# Altium PCB PCB1.PcbDoc
Units mm, origin at the board's own origin, x right, y up, seen from the top; angles counter-clockwise.
Board outline 152.4 x 101.6 mm, 2 copper layers (Top Layer, Bottom Layer); 57 components, 35 nets, 177 pads, 145 vias.
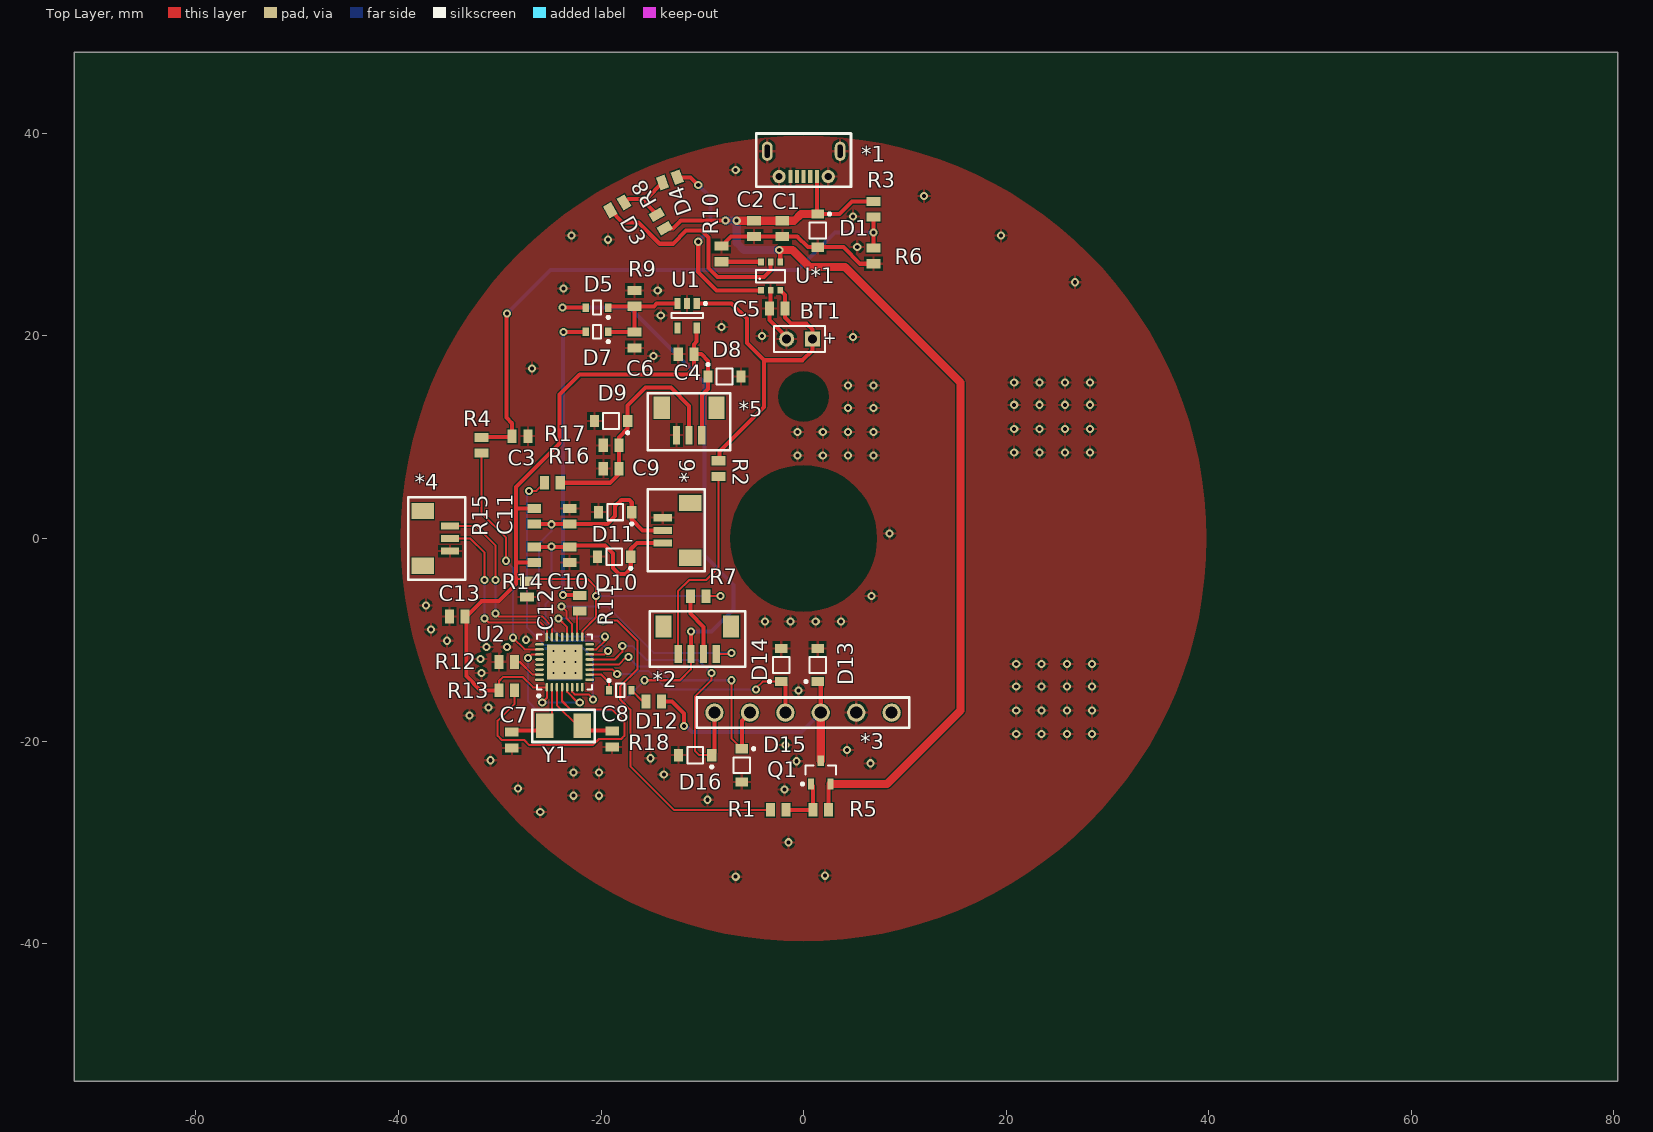
[diagram p0: Top Layer view]
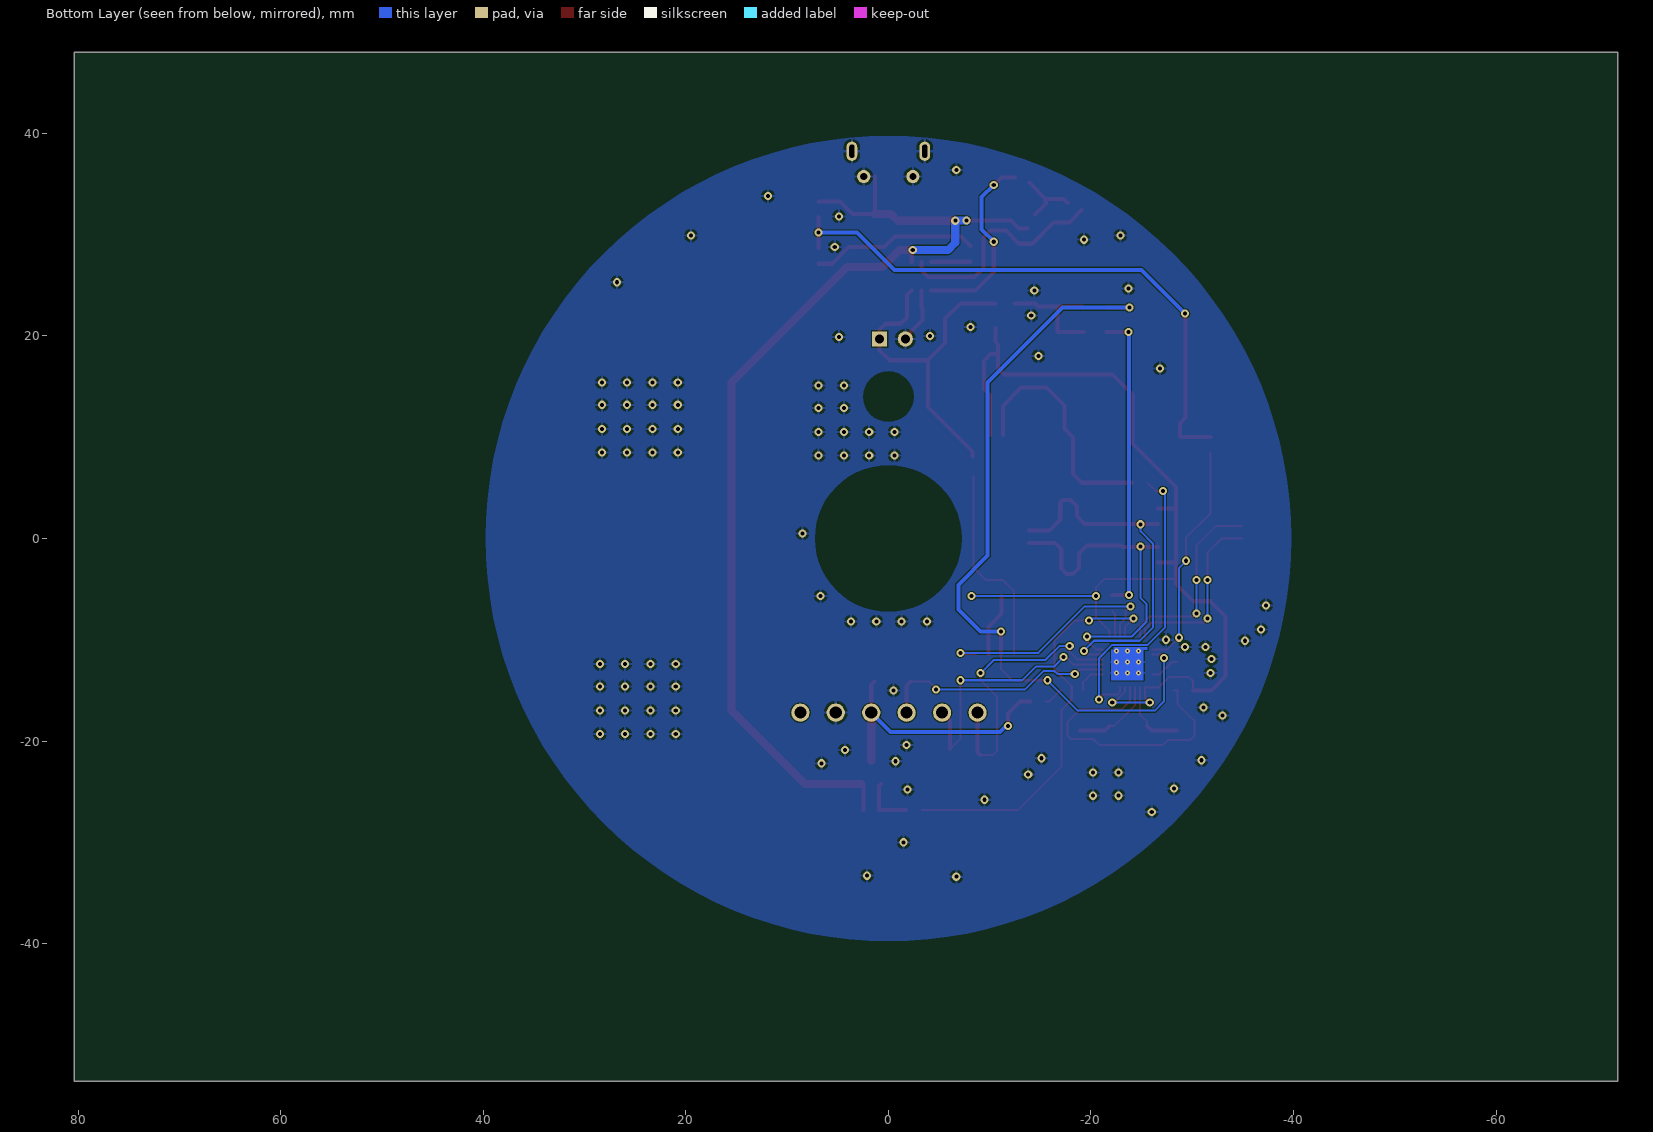
[diagram p1: Bottom Layer view, seen from below]

## Layer stack, top to bottom
Top Solder: solder mask 0.0102, Solder Resist, Dk 3.5
Top Layer: signal copper 0.0356
Dielectric 1: dielectric 0.32, FR-4, Dk 4.8
Bottom Layer: signal copper 0.0356
Bottom Solder: solder mask 0.0102, Solder Resist, Dk 3.5

## Board outline
-72.009,-53.594 80.391,-53.594 80.391,48.006 -72.009,48.006

## Design rules (kind name [scope] priority, off if disabled: settings)
Clearance [All] p1: gap=0.1
PolygonConnect [All] p1: connectstyle=Relief reliefconductorwidth=0.254 reliefentries=4 polygonreliefangle="90 Angle" airgapwidth=0.254
RoutingVias [All] p1: holewidth=0.711 width=1.27 viastyle="Through Hole" minholewidth=0.711 minwidth=1.27 maxholewidth=0.711 maxwidth=1.27
SolderMaskExpansion [All] p1: expansion=0.102
Width Width_1 [All] p1: maxlimit=0.8 minlimit=0.2 preferedwidth=0.2
Width [InNet('VBUS')] p2: maxlimit=2 minlimit=0.2 preferedwidth=0.2
29 further rules are at their usual default settings.

## Components (designator, comment, footprint, x,y, rotation, side; value= is the part's Value field where it differs from the comment)
*1 "MicroUSB" MicroUSB 0,35.8 r0 top
*2 "Plugin4P" PLUGIN4P -10.5,-11.4 r180 top
*3 "POGO" POGO 1.7,-17.2 r180 top
*4 "Plugin3P" Plugin3P -34.9,0 r270 top
*5 "Plugin3P" Plugin3P -11.3,10.2 r180 top
*6 "Plugin3P" Plugin3P -13.9,0.8 r90 top
BT1 "Battery" BAT-2 -0.4,19.7 r180 top
C1 "22uf" RESC2013X65X40LL15T20 -2.1,30.6 r90 top
C2 "22uf" RESC2013X65X40LL15T20 -4.9,30.6 r90 top
C3 "10uf" RESC2013X65X40LL15T20 -28,10.1 r180 top
C4 "10uf" RESC2013X65X40LL15T20 -11.6,18.2 r0 top
C5 "10uf" RESC2013X65X40LL15T20 -2.6,22.7 r0 top
C6 "2.2uf" RESC2013X65X40LL15T20 -16.7,19.6 r90 top
C7 "20pf" RESC2013X65X40LL15T20 -28.8,-19.9 r90 top
C8 "20pf" RESC2013X65X40LL15T20 -18.9,-19.8 r90 top
C9 "0.1uf" RESC2013X65X40LL15T20 -19,6.9 r180 top
C10 "0.1uf" RESC2013X65X40LL15T20 -23.1,-1.6 r270 top
C11 "0.1uf" RESC2013X65X40LL15T20 -23.1,2.2 r90 top
C12 "22uf" RESC2013X65X40LL15T20 -27.3,-5 r90 top
C13 "22uf" RESC2013X65X40LL15T20 -34.2,-7.7 r0 top
D1 "PTVSHC1DF7VB" ONSC-SOD-123-2-425-04_V 1.4,30.4 r270 top
D3 "LED4" RESC2013X65X40LL15T20 -18.4,32.8 r30 top
D4 "LED3" RESC2013X65X40LL15T20 -13.2,35.4 r200 top
D5 "1N5819WS" ONSC-SOD-323-2-477-02_V -20.4,22.8 r180 top
D7 "1N5819WS" ONSC-SOD-323-2-477-02_V -20.4,20.4 r180 top
D8 "PTVSHC1DF7VB" ONSC-SOD-123-2-425-04_V -7.8,16 r0 top
D9 "PTVSHC1DF7VB" ONSC-SOD-123-2-425-04_V -19,11.6 r180 top
D10 "PTVSHC1DF7VB" ONSC-SOD-123-2-425-04_V -18.7,-1.8 r180 top
D11 "PTVSHC1DF7VB" ONSC-SOD-123-2-425-04_V -18.6,2.6 r180 top
D12 "1N4007" ONSC-SOD-323-2-477-02_V -18.1,-15 r0 top
D13 "PTVSHC1DF7VB" ONSC-SOD-123-2-425-04_V 1.4,-12.5 r90 top
D14 "PTVSHC1DF7VB" ONSC-SOD-123-2-425-04_V -2.2,-12.5 r90 top
D15 "PTVSHC1DF7VB" ONSC-SOD-123-2-425-04_V -6.1,-22.4 r270 top
D16 "PTVSHC1DF7VB" ONSC-SOD-123-2-425-04_V -10.7,-21.4 r180 top
Q1 "AO3401" INF-PG-SOT23_N 1.7,-23.1 r90 top
R1 "330" RESC2013X65X40LL15T20 -2.5,-26.8 r180 top
R2 "4.7k" RESC2013X65X40LL15T20 -8.4,6.9 r90 top
R3 "4.7k" RESC2013X65X40LL15T20 6.9,32.5 r270 top
R4 "100" RESC2013X65X40LL15T20 -31.8,9.2 r270 top
R5 "10k" RESC2013X65X40LL15T20 1.7,-26.8 r180 top
R6 "10k" RESC2013X65X40LL15T20 6.9,27.9 r90 top
R7 "680" RESC2013X65X40LL15T20 -10.4,-5.7 r0 top
R8 "1k" RESC2013X65X40LL15T20 -14.1,31.3 r300 top
R9 "100k" RESC2013X65X40LL15T20 -16.7,23.7 r90 top
R10 "5k" RESC2013X65X40LL15T20 -8.1,28.1 r270 top
R11 "4.7k" RESC2013X65X40LL15T20 -22.1,-6.4 r270 top
R12 "10k" RESC2013X65X40LL15T20 -29.3,-12.2 r180 top
R13 "10k" RESC2013X65X40LL15T20 -29.3,-15 r180 top
R14 "4.7k" RESC2013X65X40LL15T20 -26.6,-1.6 r270 top
R15 "4.7k" RESC2013X65X40LL15T20 -26.6,2.2 r90 top
R16 "4.7k" RESC2013X65X40LL15T20 -24.8,5.5 r180 top
R17 "100k" RESC2013X65X40LL15T20 -19,9.2 r0 top
R18 "470" RESC2013X65X40LL15T20 -14.8,-16.1 r0 top
U1 "TLV70233DBVR" TI-DBV5_N -11.5,22 r270 top
U2 "STM32F051K6U6" STM-UFQFPN32_N -23.6,-12.2 r90 top
U*1 "TP4057" TP4057 -4.2,24.5 r90 top
Y1 "8mhz" XTAL -23.7,-18.5 r180 top

## Footprints (in the part's own frame and the unit in brackets; to place one, negate y for a bottom-side part, rotate by r counter-clockwise, add the part's x,y. Pads: shape width x height; smd on the part's side, far side on the other; paste and mask are expansions set on the pad)
BAT-2 [mm] "Multicell Battery; 2 Leads"
  rect 1.5x1.5 hole 0.9: 1(-1.27,0)
  round 1.5 hole 0.9: 2(1.27,0)
  silkscreen extent -2.54,-1.27 2.54,1.27
INF-PG-SOT23_N [mm] "SOT23, 3-Leads, Body 2.9x1.3mm, Pitch 0.95mm, IPC Medium Density"
  rect 1.05x0.6 smd: 1(-1.15,0.95) 2(-1.15,-0.95) 3(1.15,0)
  silkscreen extent -1.27,-1.5 0.7,1.92, body extent -0.7,-1.5 0.7,1.5, height 1.1
MicroUSB [mm]
  rect 0.4x1.25 smd: 1(1.313,-0.062) 2(0.663,-0.062) 3(0.013,-0.062) 4(-0.637,-0.062) 5(-1.287,-0.062)
  oval 1.07x1.9 hole 0.5 slot 1.3 at 90 deg: 5(-3.587,2.438) 5(3.613,2.438)
  round 1.3 hole 0.7: 5(-2.412,-0.062) 5(2.438,-0.062)
  silkscreen extent -4.69,-1.06 4.69,4.19
ONSC-SOD-123-2-425-04_V [mm] "SOD, 2-Leads, Body 2.69x1.6mm"
  rect 0.91x1.22 smd: 1(-1.635,0) 2(1.635,0)
  silkscreen extent -1.76,-0.8 0.78,1.29, body extent -1.35,-0.8 1.35,0.8, height 1.35
ONSC-SOD-323-2-477-02_V [mm] "SOD, 2-Leads, Body 1.7x1.25mm"
  rect 0.63x0.83 smd: 1(-1.115,0) 2(1.115,0)
  silkscreen extent -1.24,-0.67 0.4,1.09, body extent -0.85,-0.63 0.85,0.63, height 1.06
Plugin3P [mm]
  rect 0.7x1.8 smd: 1(-1.25,0) 2(0,0) 3(1.25,0)
  rect 1.6x2.2 smd: ""(-2.7,-2.7) ""(2.7,-2.7)
  silkscreen extent -4.05,-4.13 4.08,1.48
PLUGIN4P [mm]
  rect 0.7x1.8 smd: 1(-1.875,0) 2(-0.625,0) 3(0.625,0) 4(1.875,0)
  rect 1.6x2.2 smd: ""(-3.325,-2.7) ""(3.325,-2.7)
  silkscreen extent -4.73,-4.2 4.67,1.28
POGO [mm]
  round 1.8 hole 1.2: 1(-7,0) 2(-3.5,0) 3(0,0) 4(3.5,0) 5(7,0) 6(10.5,0)
  silkscreen extent -8.75,-1.5 12.25,1.5
RESC2013X65X40LL15T20 [mm] "Chip Resistor, 2-Leads, Body 2.00x1.3 mm, IPC High Density"
  rect 0.9x1.35 smd: 1(-0.775,0) 2(0.775,0)
  body extent -1.07,-0.72 1.07,0.72, height 0.65
STM-UFQFPN32_N [mm] "QFN, 32-Leads, Body 5.1x5.1mm, Pitch 0.5mm, Thermal Pad 3.5x3.5mm, IPC Medium Density"
  oval 0.85x0.25 smd: 1(-2.475,1.75) 2(-2.475,1.25) 3(-2.475,0.75) 4(-2.475,0.25) 5(-2.475,-0.25) 6(-2.475,-0.75) 7(-2.475,-1.25) 8(-2.475,-1.75) 17(2.475,-1.75) 18(2.475,-1.25) 19(2.475,-0.75) 20(2.475,-0.25) 21(2.475,0.25) 22(2.475,0.75) 23(2.475,1.25) 24(2.475,1.75)
  oval 0.25x0.85 smd: 9(-1.75,-2.475) 10(-1.25,-2.475) 11(-0.75,-2.475) 12(-0.25,-2.475) 13(0.25,-2.475) 14(0.75,-2.475) 15(1.25,-2.475) 16(1.75,-2.475) 25(1.75,2.475) 26(1.25,2.475) 27(0.75,2.475) 28(0.25,2.475) 29(-0.25,2.475) 30(-0.75,2.475) 31(-1.25,2.475) 32(-1.75,2.475)
  rect 3.5x3.5 smd: 33(0,0)
  silkscreen extent -3.47,-2.7 2.7,2.7, body extent -2.55,-2.55 2.55,2.55, height 0.6
TI-DBV5_N [mm] "SOT23, 5-Leads, Body 2.9x1.6mm, Pitch 0.95mm, IPC Medium Density"
  rect 1.1x0.6 smd: 1(-1.2,0.95) 2(-1.2,0) 3(-1.2,-0.95) 4(1.2,-0.95) 5(1.2,0.95)
  silkscreen extent -1.32,-1.55 0.25,1.93, body extent -0.87,-1.52 0.87,1.53, height 1.45
TP4057 [mm]
  rect 0.65x0.55 smd: 1(0,0) 2(0,-0.95) 3(0,-1.9) 4(2.8,-1.9) 5(2.8,-0.95) 6(2.8,0)
  silkscreen extent 0.76,-2.38 2.03,0.51
XTAL [mm]
  rect 1.7x2.4 smd: 1(-1.85,0) 2(1.85,0)
  silkscreen extent -3.1,-1.58 3.1,1.6

## Part data
BT1: "Multicell Battery"
C1 C2 C3 C4 C5 C6 C7 C8 C9 C10 C11 C12 C13: library part Cap, "Capacitor"
D1 D8 D9 D10 D11 D13 D14 D15 D16: library part MMSZ39T1G, "Zener Voltage Regulator, 500 mW, 2-Pin SOD-123, Pb-Free, Tape and Reel"
D3: library part LED3, "Typical BLUE SiC LED"
D4: "Typical BLUE SiC LED"
D5 D7 D12: library part "Diode 1N5402", "3 Amp General Purpose Rectifier"
Q1: library part "BSS215P H6327", "P-Channel OptiMOS P2 Small-Signal-Transistor, -20?V VDS, -1.5?A ID, -55 to 150 degC, PG-SOT23, Reel, Green"
R1 R2 R3 R4 R5 R6 R7 R8 R9 R10 R11 R12 R13 R14 R15 R16 R17 R18: library part CRG0805ZR, "Chip Resistor, 0 Ohm, 0.125 W, -55 to 125 degC, 0805 (2012 Metric), RoHS, Tape and Reel"
U1: "Single Output LDO, 300 mA, Fixed 3.3 V Output, 2 to 5.5 V Input, with Low IQ, 5-pin SOT-23 (DBV), -40 to 125 degC, Green (RoHS & no Sb/Br)"
U2: "ARM Cortex-M0 32-bit MCU, 32 KB Flash, 4 KB Internal RAM, 27 I/Os, 32-pin UFQFPN, -40 to 85 degC, Tray"
Y1: library part XTAL, "Crystal Oscillator"

## Via types
v1: diameter 0.8, hole 0.4, Top Layer to Bottom Layer, 136 vias
v2: diameter 0.5, hole 0.2, Top Layer to Bottom Layer, 9 vias

## Nets (pads, with @x,y where several pads share a name; then routed paths per layer and width w, separated by ;. In a path a pad name is that pad's centre, name@x,y a point inside that pad or via, vN(x,y) a via of type N, cw(c..) or ccw(c..) an arc to the next point about the centre after c; other vN are vias at no path point)
+3.3: *5.1 C4.2 C12.2 C13.2 D8.1 R7.2 R13.2 R14.2 R15.2 U1.5 U2.1 U2.5 U2.17 | length 108.8
  Top Layer w0.2: R13.2 -30.075,-14.075 -29.7,-13.7 -27.7,-13.7 -26.7,-14.7 -25.4,-14.7 -25.35,-14.65 U2.1 -25.35,-15.75 v1@-25.6,-16 ; -28.4,-4 -21.3,-4 -20.5,-4.8 -20.5,-7.8 -21.85,-9.15 U2.17 ; U2.5 -23.35,-15.15 -22.35,-16.15 v1@-22.1,-15.9 ; R7.2 v1(-8.2,-5.7)
  Top Layer w0.4: R13.2 -31.9,-15 -33.3,-13.6 -33.3,-7.7 -31.8,-6.2 -30.1,-6.2 -28.4,-4.5 -28.4,-4 -28.4,5.1 -24.1,9.4 -24.1,14.2 -22.1,16.2 -11.4,16.2 -10.825,16.775 C4.2 ; -28.375,-2.375 R14.2 ; -28.375,2.975 R15.2 ; U1.5 -10.55,19.45 -10.825,19.175 C4.2 ; *5.1 -10.05,14.15 -9.435,14.765 D8.1 -9.435,17.535 -10.1,18.2 C4.2
  Bottom Layer w0.2: v1(-25.8,-16.2) v1(-22.1,-16.2) ; v1(-20.5,-5.7) v1(-8.2,-5.7)
ADC: R16.2 U2.6 | length 29.9
  Top Layer w0.2: v1(-27.1,4.7) -26.375,4.7 R16.2 ; U2.6 -22.85,-15.15 -22.6,-15.4 -21.2,-15.4 v1@-20.9,-15.7
  Bottom Layer w0.2: v1(-27.1,4.7) -27.3,4.5 -27.3,-8.8 -25.6,-10.5 -22.1,-10.5 -20.8,-11.8 v1(-20.8,-15.9)
BAT: BT1.1 C5.2 R2.2 U1.1 U*1.3 | length 35
  Top Layer w0.4: U1.1 -7.1,23.2 -5.6,21.7 -5.6,19.3 -3.9,17.6 ; R2.2@-8.3,8.1 -8.3,8.6 -3.9,13 -3.9,17.6 ; U*1.3 -1.825,24.025 C5.2 -1.825,21.825 -1.2,21.2 0.3,21.2 0.87,20.63 BT1.1 0.87,18.57 -0.1,17.6 -3.9,17.6
GND: *1.5 *3.2 *4.3 *5.3 *6.3 BT1.2 C1.1 C2.1 C3.1 C4.1 C5.1 C6.1 C7.1 C8.1 C9.2 C10.2 C11.2 C12.1 C13.1 D1.2 D8.2 D9.2 D10.2 D11.2 D13.2 D14.2 D15.2 D16.2 R6.1 R9.2 R10.1 R12.2 R17.1 U1.2 U2.33 U*1.2 | length 28.7
  Top Layer w0.4: R10.1 -7.175,29.8 -4.925,29.8 C2.1 C1.1 -0.625,29.825 0.435,28.765 D1.2 3.935,28.765 5.575,27.125 R6.1 ; U*1.2 -3.25,22.825 C5.1 -3.375,21.575 -1.67,19.87 BT1.2
  Bottom Layer w0.4: v2(-24.7,-12.2) v2(-23.6,-12.2) ; v2(-24.7,-11.1) v2(-23.6,-11.1) ; v2(-23.6,-13.3) v2(-23.6,-12.2) ; v2(-22.5,-12.2) v2(-23.6,-12.2) ; v2(-22.5,-11.1) v2(-23.6,-11.1) ; v2(-23.6,-12.2) v2(-23.6,-11.1)
  other v1: -6.7,-33.4 2.1,-33.3 -1.5,-30 -26,-27 -9.5,-25.8 -22.7,-25.4 -20.2,-25.4 -1.9,-24.8 -28.2,-24.7 -13.8,-23.3 -22.7,-23.1 -20.2,-23.1 6.6,-22.2 -0.7,-22 -30.9,-21.9 -15.1,-21.7 4.3,-20.9 -1.8,-20.4 21,-19.3 23.5,-19.3 26,-19.3 28.5,-19.3 -33,-17.5 21,-17 23.5,-17 26,-17 28.5,-17 -31.1,-16.7 -0.5,-15 21,-14.6 23.5,-14.6 26,-14.6 28.5,-14.6 -31.8,-13.3 21,-12.4 23.5,-12.4 26,-12.4 28.5,-12.4 -31.9,-11.9 -31.3,-10.7 -29.3,-10.7 -35.2,-10.1 -35.2,-10.1 -27.4,-10 -36.8,-9 -3.8,-8.2 -1.3,-8.2 1.2,-8.2 3.7,-8.2 -37.3,-6.6 6.7,-5.7 8.5,0.5 -0.6,8.2 1.9,8.2 4.4,8.2 6.9,8.2 20.8,8.5 23.3,8.5 25.8,8.5 28.3,8.5 -0.6,10.5 1.9,10.5 4.4,10.5 6.9,10.5 20.8,10.8 23.3,10.8 25.8,10.8 28.3,10.8 4.4,12.9 6.9,12.9 20.8,13.2 23.3,13.2 25.8,13.2 28.3,13.2 4.4,15.1 6.9,15.1 20.8,15.4 23.3,15.4 25.8,15.4 28.3,15.4 -26.8,16.8 -14.8,18 4.9,19.9 -4.1,20 -8.1,20.9 -14.1,22 -14.4,24.5 -23.7,24.7 26.8,25.3 5.3,28.8 -19.3,29.5 -22.9,29.9 19.5,29.9 4.9,31.8 11.9,33.8 -6.7,36.4
  other v2: -24.7,-13.3 -22.5,-13.3
KEY: *2.3 D5.2 U2.27 | length 75.5
  Top Layer w0.2: v1(-27.2,-11.8) -26.85,-11.45 U2.27 ; v1(-15.7,-14) -12.2,-14 -11.125,-12.925 *2.3
  Top Layer w0.4: v1(-23.8,22.8) D5.2 ; *2.3 v1@-11.125,-9.225
  Bottom Layer w0.2: v1(-27.2,-11.8) -27.2,-16.1 -26.3,-17 -18.7,-17 v1(-15.7,-14)
  Bottom Layer w0.4: v1(-23.8,22.8) -17.2,22.8 -9.8,15.4 -9.8,-1.7 -6.9,-4.6 -6.9,-7 -9.1,-9.2 v1(-11.1,-9.2)
MCU_CONTROL: D7.2 R11.1 | length 29.8
  Top Layer w0.4: v1(-23.74,-5.565) -22.16,-5.565 R11.1 ; v1(-23.705,20.395) D7.2@-21.52,20.395
  Bottom Layer w0.4: v1(-23.74,-5.565) v1@-23.74,20.36
MCU_ENCODE_A: *6.2 C11.1 D11.1 R15.1 U2.14 | length 36.9
  Top Layer w0.2: U2.14 -19.65,-11.45 v1(-19.3,-11.1)
  Top Layer w0.4: R15.1 C11.1 -19.375,1.425 -18.6,2.2 -18.6,3.2 -18,3.8 -17.2,3.8 -16.965,3.565 D11.1 -16.965,1.865 -15.9,0.8 *6.2
  Bottom Layer w0.2: v1(-24.9,1.4) -24.9,0.7 -26.1,-0.5 -26.1,-8.8 -24.8,-10.1 -20.3,-10.1 v1(-19.3,-11.1)
MCU_ENCODE_B: *6.1 C10.1 D10.1 R14.1 U2.15 | length 33.6
  Top Layer w0.2: U2.15 -20.45,-10.95 -19.6,-10.1 v1(-19.6,-9.7)
  Top Layer w0.4: R14.1 C10.1 -22.975,-0.7 -19.6,-0.7 -18.8,-1.5 -18.8,-2.9 -18.2,-3.5 -17.6,-3.5 -17.065,-2.965 D10.1 -17.065,-1.065 -16.45,-0.45 *6.1
  Bottom Layer w0.2: v1(-24.9,-0.8) -24.9,-5.9 -25.5,-6.5 -25.5,-8.2 -24,-9.7 v1(-19.6,-9.7)
MCU_POW_LED: *2.1 U2.19 | length 23.7
  Top Layer w0.2: v1(-23.9,-6.7) -23.4,-7.2 -23.4,-7.9 -22.85,-8.45 U2.19 ; *2.1 -7.2,-11.4 v1(-7.1,-11.3)
  Bottom Layer w0.2: v1(-23.9,-6.7) -19.4,-6.7 -14.8,-11.3 v1(-7.1,-11.3)
Net*2_2: *2.2 R7.1 | length 6.2
  Top Layer w0.4: R7.1 -11.175,-7.425 -9.875,-8.725 *2.2
Net*2_4: *2.4 R2.1 | length 20.2
  Top Layer w0.2: *2.4 -12.375,-5.175 -11.3,-4.1 -9.6,-4.1 -8.4,-2.9 R2.1
Net*3_4: *3.4 D14.1 U2.11 | length 23.6
  Top Layer w0.2: U2.11 -18.85,-12.95 v1(-18.4,-13.4) ; v1(-4.7,-14.9) -4.7,-14.8 -4.035,-14.135 D14.1
  Top Layer w0.4: D14.1 -1.8,-14.535 *3.4
  Bottom Layer w0.2: v1(-18.4,-13.4) -16.7,-13.4 -16.4,-13.1 -15.3,-13.1 -13.5,-14.9 v1(-4.7,-14.9)
Net*3_5: *3.5 D15.1 U2.12 | length 26.4
  Top Layer w0.2: U2.12 -18.25,-12.45 -17.5,-11.7 v1(-17.3,-11.7) ; v1(-7.1,-14) -7.1,-19.765 D15.1
  Top Layer w0.4: D15.1 -6.1,-18 *3.5
  Bottom Layer w0.2: v1(-17.3,-11.7) -16.35,-12.65 -14.55,-12.65 -13.2,-14 v1(-7.1,-14)
Net*3_6: *3.6 D16.1 U2.13 | length 28.5
  Top Layer w0.2: U2.13 -18.65,-11.95 -17.9,-11.2 v1(-17.9,-10.6) ; v1(-9.1,-13.3) -9.1,-14 -10.7,-15.6 -10.7,-21 -10.3,-21.4 D16.1
  Top Layer w0.4: D16.1 -8.8,-21.135 *3.6
  Bottom Layer w0.2: v1(-17.9,-10.6) -16.9,-10.6 -15.5,-12 -10.4,-12 v1(-9.1,-13.3)
Net*4_1: *4.1 U2.23 | length 19.2
  Top Layer w0.2: *4.1 -32.35,1.25 -30.4,-0.7 v1(-30.4,-4.1) ; v1(-30.4,-7.4) -30.1,-7.7 -25.8,-7.7 -24.85,-8.65 U2.23
  Bottom Layer w0.2: v1(-30.4,-7.4) v1(-30.4,-4.1)
Net*4_2: *4.2 U2.24 | length 17.8
  Top Layer w0.2: *4.2 -32.9,0 -31.5,-1.4 v1(-31.5,-4.1) ; v1(-31.5,-7.9) -31.1,-8.3 -26,-8.3 -25.35,-8.95 U2.24
  Bottom Layer w0.2: v1(-31.5,-7.9) v1(-31.5,-4.1)
Net*5_2: *5.2 C9.1 D9.1 R16.1 R17.2 | length 23.7
  Top Layer w0.4: R16.1 -19.1,5.5 -18.225,6.375 -18.225,7 R17.2 -18.225,9.975 -17.365,10.835 D9.1 -17.365,13.135 -15.6,14.9 -13.1,14.9 -11.3,13.1 *5.2
NetC3_2: C3.2 R3.2 R4.1 R6.2 | length 58
  Top Layer w0.4: R4.1@-31.825,10 -28.875,10 C3.2 -28.775,11.375 -29.335,11.935 -29.335,13 v1@-29.335,22.165 ; R6.2 R3.2
  Bottom Layer w0.4: v1(-29.3,22.2) -25,26.5 -0.6,26.5 3.1,30.2 v1(6.9,30.2)
NetC6_2: C6.2 D5.1 D7.1 R9.1 U1.3 | length 12.1
  Top Layer w0.4: D7.1@-19.285,20.4 -19.26,20.375 C6.2 R9.1 ; D5.1 -19.16,22.925 R9.1 ; U1.3 -14.5,23.2 -14.775,22.925 R9.1
NetC7_2: C7.2 U2.2 Y1.2 | length 7.3
  Top Layer w0.2: Y1.2 -25.55,-18.1 -24.85,-17.4 U2.2
  Top Layer w0.4: C7.2@-28.5,-18.975 -26.025,-18.975 Y1.2
NetC8_2: C8.2 U2.3 Y1.1 | length 8.3
  Top Layer w0.2: U2.3 -24.35,-16.45 -22.3,-18.5 Y1.1
  Top Layer w0.4: Y1.1 -21.375,-18.975 C8.2@-18.9,-18.975
NetD3_1: D3.1 U*1.5 | length 22.5
  Top Layer w0.4: D3.1 -17.859,31.2 -16.3,31.2 -14.2,29.1 -12.9,29.1 -11.6,30.4 -10.1,30.4 -9.4,29.7 -9.4,26.7 -8.5,25.8 -3.9,25.8 -3.25,26.45 U*1.5
NetD3_2: D3.2 D4.2 R8.1 | length 6.6
  Top Layer w0.4: D3.2 -17.613,33.187 -17.268,33.532 -15.532,33.532 ; R8.1 -15.532,33.015 -15.532,33.532 ; D4.2 -15.532,33.532
NetD4_1: D4.1 U*1.1 | length 18.9
  Top Layer w0.4: D4.1 -11.165,35.665 v1(-10.4,34.9) ; v1(-10.4,29.3) -10.4,26.3 -8.6,24.5 U*1.1
  Bottom Layer w0.4: v1(-10.4,29.3) -9.2,30.5 -9.2,33.7 v1(-10.4,34.9)
NetD12_1: D12.1 U2.10 | length 3
  Top Layer w0.2: U2.10 -19.95,-13.45 -19.215,-14.185 D12.1
NetD12_2: D12.2 R18.1 | length 1.9
  Top Layer w0.2: D12.2 -15.885,-16.1 R18.1
NetQ1_1: Q1.1 R1.1 R5.2 | length 5.3
  Top Layer w0.4: R1.1 R5.2 0.925,-24.425 Q1.1
NetR10_2: R10.2 U*1.6 | length 3.9
  Top Layer w0.4: R10.2 -4.225,27.325 U*1.6
NetR11_2: R11.2 U2.18 | length 2.7
  Top Layer w0.2: U2.18 -22.35,-7.425 R11.2
NetR12_1: R12.1 U2.31 | length 3
  Top Layer w0.2: R12.1 -28,-12.2 -26.75,-13.45 U2.31
NetR13_1: R13.1 U2.4 | length 28.5
  Top Layer w0.2: R13.1@-28.2,-15 R13.1 -28.525,-16.325 -30.2,-18 -30.2,-19.5 -29.8,-19.9 -27.6,-19.9 -27.1,-20.4 -20.8,-20.4 -20.2,-19.8 -18,-19.8 -17.7,-19.5 -17.7,-18.1 -18.9,-16.9 -23,-16.9 -23.85,-16.05 U2.4
POW_CHECK: R4.2 U2.26 | length 22.6
  Top Layer w0.2: R4.2 -31.8,2.5 -29.4,0.1 v1(-29.4,-2.2) ; v1(-28.7,-9.8) -27.55,-10.95 U2.26
  Bottom Layer w0.2: v1(-29.4,-2.2) -28.7,-2.9 v1(-28.7,-9.8)
POW_EN: R1.2 U2.20 | length 40
  Top Layer w0.2: v1(-24.2,-7.9) -23.35,-8.75 U2.20 ; v1(-19.8,-8.1) -18.4,-8.1 -16.4,-10.1 -16.4,-12.9 -18.1,-14.6 -18.1,-15.9 -17.1,-16.9 -17.1,-22.5 -12.8,-26.8 R1.2
  Bottom Layer w0.2: v1(-24.2,-7.9) -20,-7.9 v1(-19.8,-8.1)
TRACKER_POW: *3.3 D13.1 Q1.3 R18.2 | length 26.7
  Top Layer w0.4: R18.2 -13,-16.1 -11.8,-17.3 v1(-11.8,-18.5) ; D13.1 1.7,-14.435 *3.3
  Top Layer w0.8: Q1.3 *3.3
  Bottom Layer w0.4: v1(-11.8,-18.5) -11.8,-18.3 -11,-19.1 -0.2,-19.1 *3.3
VBUS: *1.1 C1.2 C2.2 D1.1 Q1.2 R3.1 R5.1 R8.2 U*1.4 | length 107.5
  Top Layer w0.4: R8.2 -12.871,30.629 -12.125,31.375 v1@-7.4,31.375 ; v1(-2.4,28.5) -2.3,28.4 U*1.4 ; D1.1@1.313,32.122 *1.1 ; D1.1 3.535,32.035 4.775,33.275 R3.1 ; R5.1 Q1.2@2.475,-24.425
  Top Layer w0.8: v1(-6.6,31.375) C2.2 C1.2 -0.925,31.375 -0.265,32.035 D1.1 ; v1(-2.4,28.5) -1.1,28.5 0.6,26.8 4.1,26.8 15.5,15.4 15.5,-17 8.25,-24.25 Q1.2
  Bottom Layer w0.4: v1@-6.625,31.4 v1(-6.6,31.375)
  Bottom Layer w0.8: v1(-7.7,31.4) v1@-6.625,31.4 ; v1(-6.6,31.375) -6.6,29.2 -5.9,28.5 v1(-2.4,28.5)
pads on no net: *1.2 *1.3 *1.4 *2. *3.1 *4. *5. *6. U1.4 U2.7 U2.8 U2.9 U2.16 U2.21 U2.22 U2.25 U2.28 U2.29 U2.30 U2.32

## Polygon pours and split planes (outlines as drawn)
GND on Bottom Layer "Bottom Layer-No Net" (solid, remove dead copper, pour order 6): -46.9,43.1 46.4,43.1 48.4,41.1 49,40.5 49,-41.8 -46.7,-41.8 -49.1,-39.4
GND on Top Layer "Bottom Layer-No Net" (solid, remove dead copper, pour order 11): 54.5,-47 -55.2,-47 -55.8,-47.6 -52.8,-44.6 -52.8,44.2 49.6,44.2 52.5,41.3

## Other copper
Bottom Layer:
  rectangle net GND: -25.189,-14 -22,-10.973
  rectangle net GND: -25.6,-11 -22.2,-10.704

## Silkscreen, mask and mechanical layers (free items; w line width, h text height)
Mechanical 1:
  circle w0.254: c0,14 r2.25
  circle w0.254: c0,0 r40
  circle w0.254: c0,0 r3

## Text inside footprints (layer, text, board x,y; h text height)
BT1: Top Overlay "+" at 3.27,20.277 h1.15 r180